# Altium PCB 5x5_ControllerBreakout.PcbDoc
Units mm, origin at the board's own origin, x right, y up, seen from the top; angles counter-clockwise.
Board outline 50 x 50 mm, 2 copper layers (Top Layer, Bottom Layer), stack 0.325 mm thick; 4 components, 32 nets, 178 pads, 23 vias.
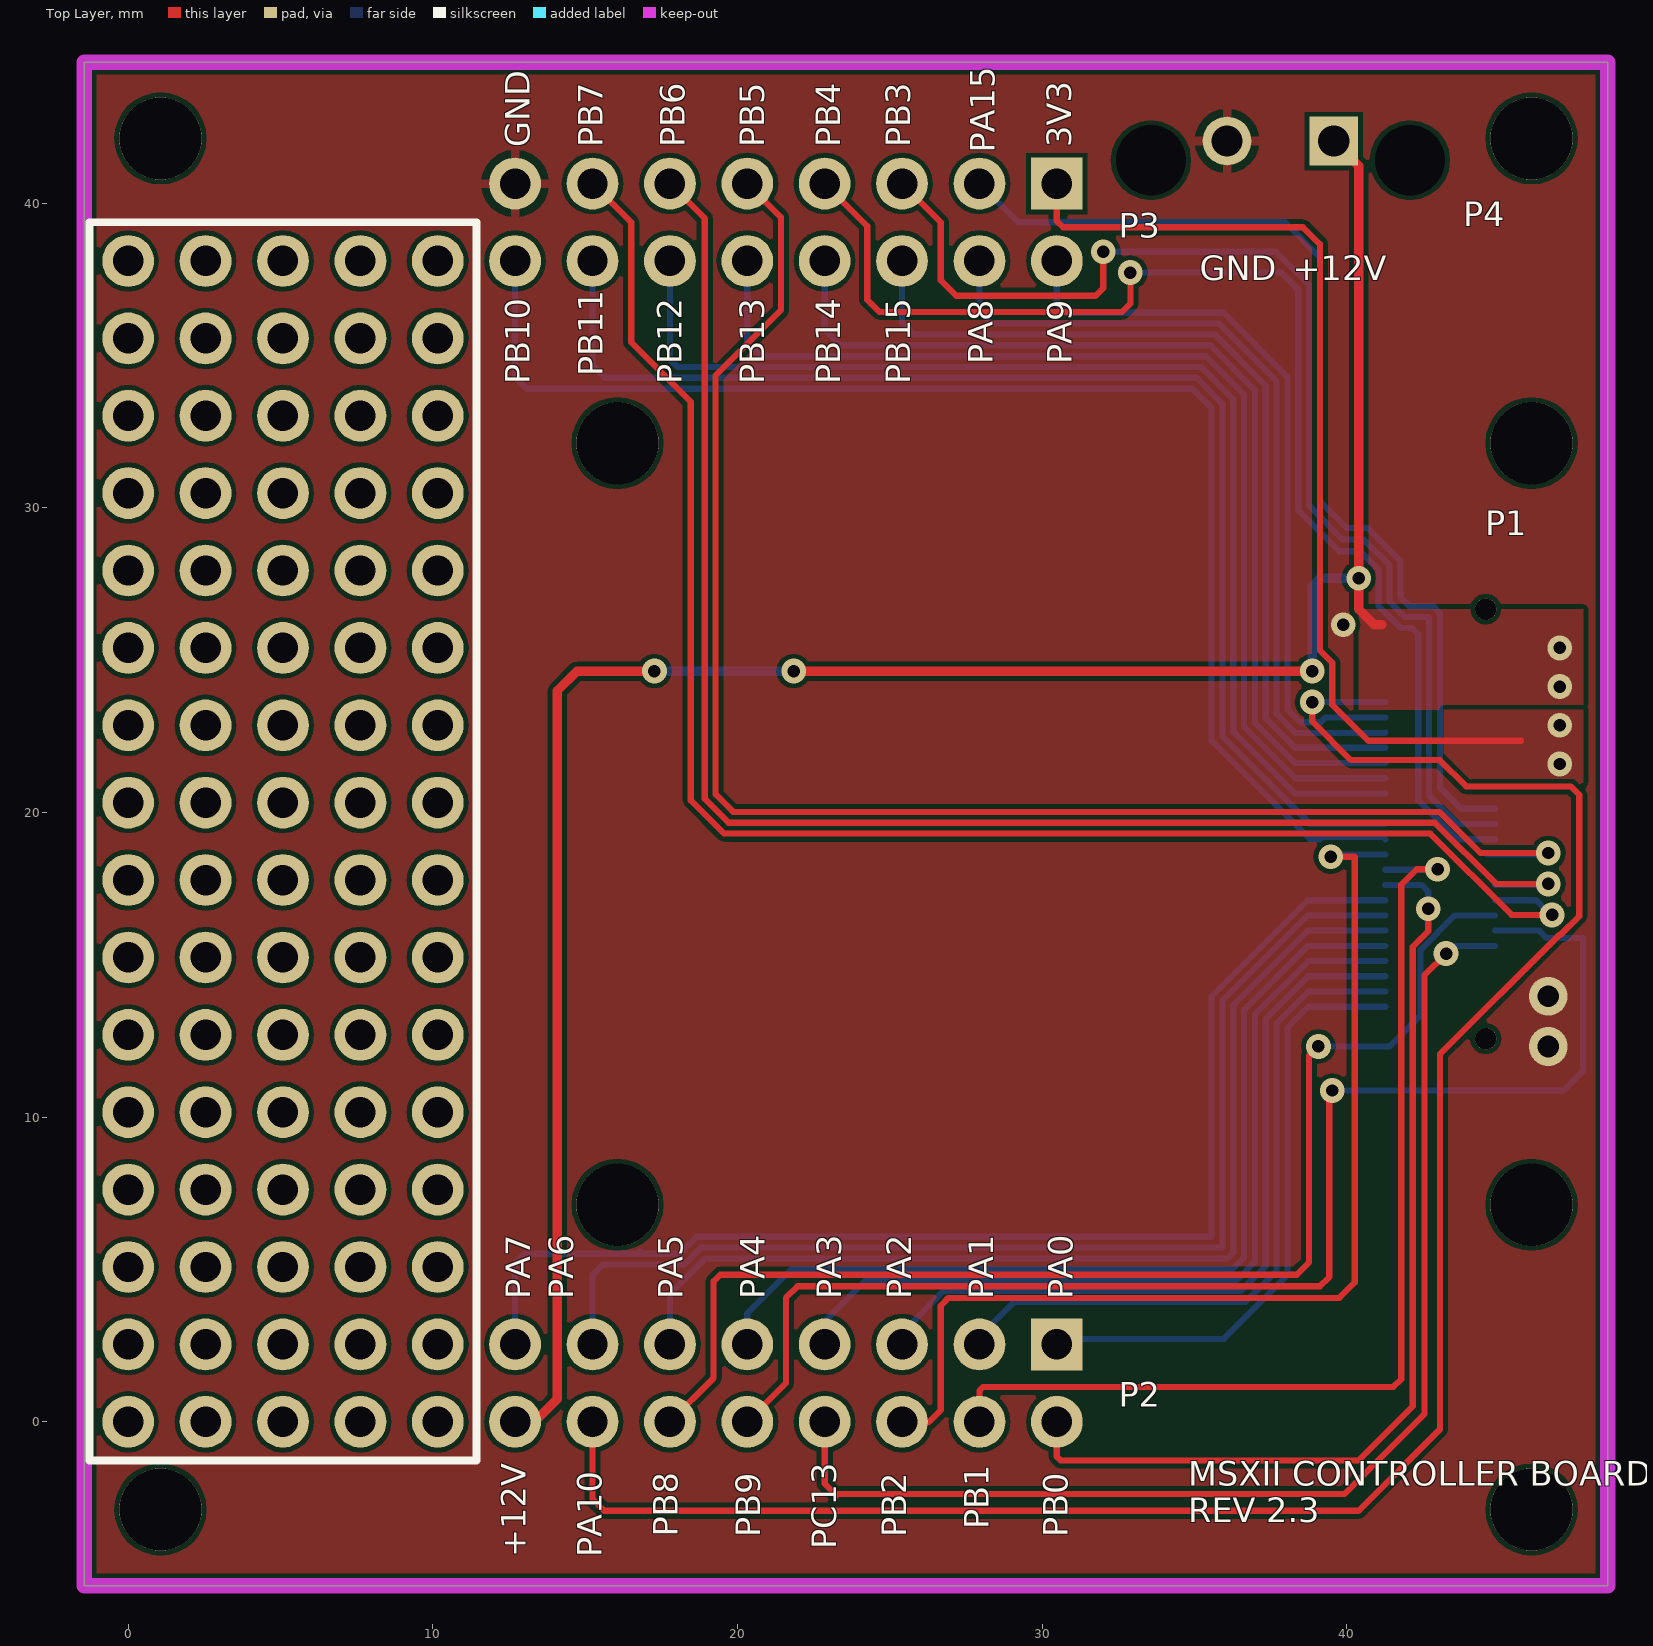
[diagram p0: Top Layer view]
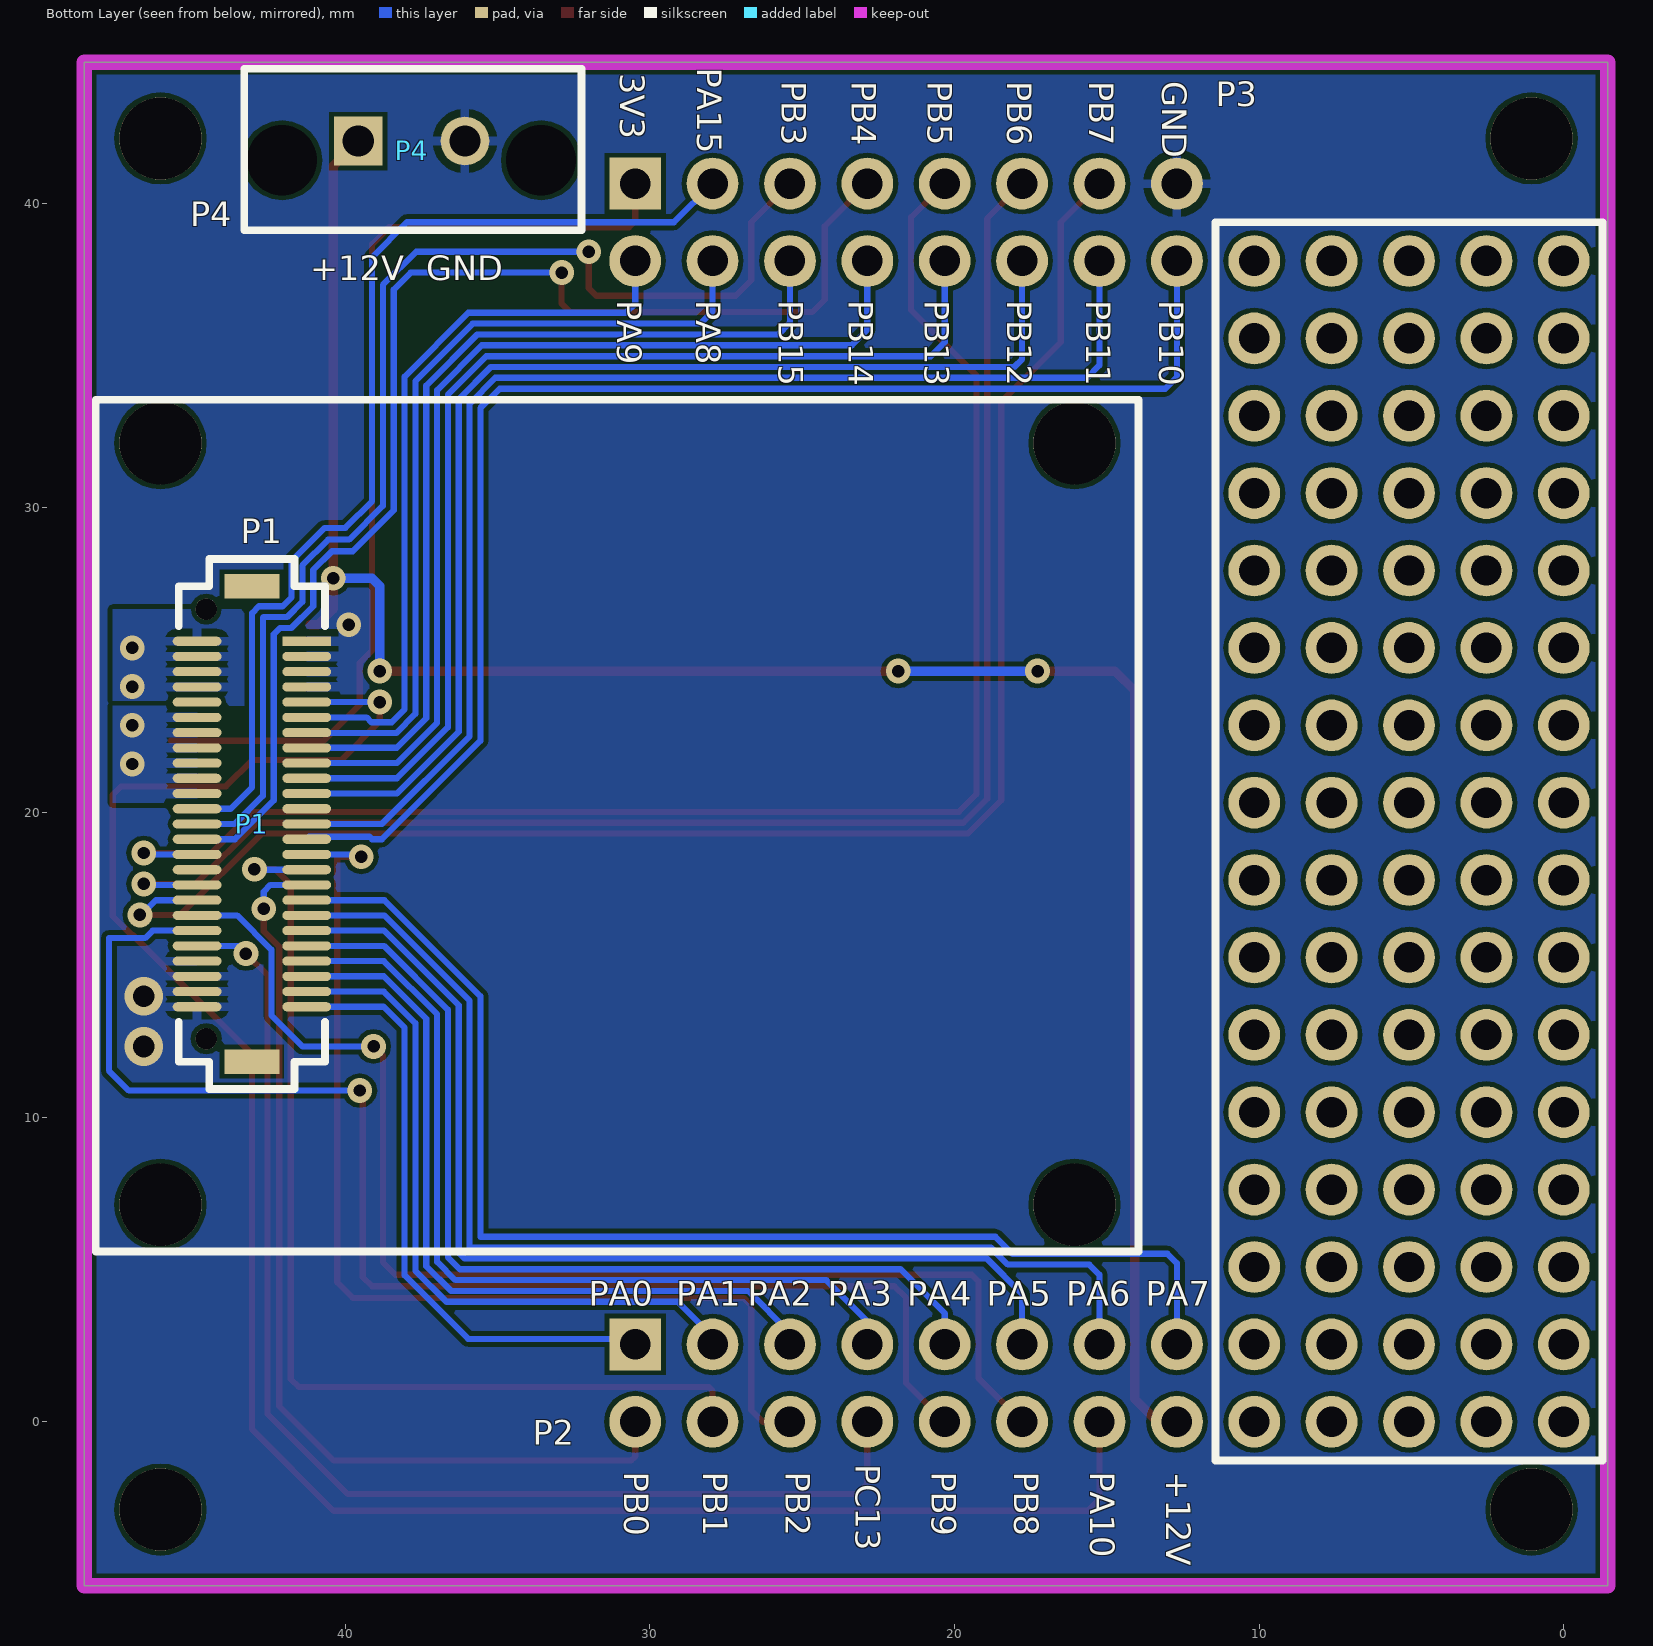
[diagram p1: Bottom Layer view, seen from below]

## Layer stack, top to bottom
Top Solder: solder mask 0.0102, Solder Resist, Dk 3.5
Top Layer: signal copper 0.0356
Dielectric 1: core 0.254, FR-4, Dk 4.2
Bottom Layer: signal copper 0.0356
Bottom Solder: solder mask 0.0102, Solder Resist, Dk 3.5

## Board outline
-1.44,-5.38 48.56,-5.38 48.56,44.62 -1.44,44.62

## Design rules (kind name [scope] priority, off if disabled: settings)
Clearance [All] p1: gap=0.152
HoleSize [All] p1: absolutevalues=TRUE maxlimit=5.08 minlimit=0.025 maxpercent=80.000 minpercent=20.000
PolygonConnect 3V3_Via_PolygonConnect [IsVia vs InNet('3V3')] p1: connectstyle=Direct reliefconductorwidth=0.3 reliefentries=4 polygonreliefangle="90 Angle" airgapwidth=0.254
PolygonConnect 12V_Via_PolygonConnect [IsVia vs InNet('+12V')] p2: connectstyle=Direct reliefconductorwidth=0.3 reliefentries=4 polygonreliefangle="90 Angle" airgapwidth=0.254
PolygonConnect GND_Via_PolygonConnect [IsVia vs InNet('GND')] p3: connectstyle=Direct reliefconductorwidth=0.3 reliefentries=4 polygonreliefangle="90 Angle" airgapwidth=0.254
PolygonConnect 3V3_Header_PolygonConnect [HasFootprint('CONN HEADER 8POS .100" SNGL SMD') vs InNet('3V3')] p4: connectstyle=Direct reliefconductorwidth=0.3 reliefentries=4 polygonreliefangle="90 Angle" airgapwidth=0.254
PolygonConnect [All] p5: connectstyle=Relief reliefconductorwidth=0.3 reliefentries=4 polygonreliefangle="90 Angle" airgapwidth=0.254
RoutingVias [All] p1: holewidth=0.3 width=0.605 viastyle="Through Hole" minholewidth=0.3 minwidth=0.605 maxholewidth=5.08 maxwidth=5.08
SolderMaskExpansion [All] p1: expansion=0.102
Width [All] p1: maxlimit=2.54 minlimit=0.152 preferedwidth=0.203 minimp=50.000000 maximp=50.000000 favimp=50.000000
29 further rules are at their usual default settings.

## Classes and differential pairs
component class MSXII_Controller_Breakout: P2 P3 P4
component class Controller_Board_Interface: P1

## Components (designator, comment, footprint, x,y, rotation, side; value= is the part's Value field where it differs from the comment)
P1 "CONN 50POS Bergstak Plug 0.02\"" "CONN, Bergstak 50 Pos Plug" 43.06,19.62 r180 bottom locked
P2 "16POS" "CONN, 16POS 0.100\" Header" 30.48,2.54 r180 top
P3 "16POS" "CONN, 16POS 0.100\" Header" 30.48,40.64 r180 top
P4 "CONN 2POS ULTRA-FIT 0.138\"" "CONN, 2POS ULTRA-FIT" 39.568,42.037 r180 bottom

## Footprints (in the part's own frame and the unit in brackets; to place one, negate y for a bottom-side part, rotate by r counter-clockwise, add the part's x,y. Pads: shape width x height; smd on the part's side, far side on the other; paste and mask are expansions set on the pad)
"CONN, 2POS ULTRA-FIT" [mm] "2 Positions Header, Shrouded Connector 0.138\" (3.50mm) Through Hole Gold"
  rect 1.6x1.6 hole 1.02: 1(0,0)
  round 1.6 hole 1.02: 2(3.5,0)
  round 1.6 hole 2.3: ""(-2.5,-0.63) ""(6,-0.63)
  silkscreen extent -3.74,-2.93 7.33,2.37, body extent -3.48,-2.87 7.12,5.79, height 13.85
"CONN, 16POS 0.100\" Header" [mm]
  rect 1.7x1.7 hole 1: 1(0,0)
  round 1.7 hole 1: 2(2.54,0) 3(5.08,0) 4(7.62,0) 5(10.16,0) 6(12.7,0) 7(15.24,0) 8(17.78,0) 9(17.78,2.54) 10(15.24,2.54) 11(12.7,2.54) 12(10.16,2.54) 13(7.62,2.54) 14(5.08,2.54) 15(2.54,2.54) 16(0,2.54)
"CONN, Bergstak 50 Pos Plug" [mm] "Bergstak 50 Position Plug"
  rect 1.6x0.3 smd: 1(1.8,6)
  oval 1.6x0.3 smd: 2(1.8,5.5) 3(1.8,5) 4(1.8,4.5) 5(1.8,4) 6(1.8,3.5) 7(1.8,3) 8(1.8,2.5) 9(1.8,2) 10(1.8,1.5) 11(1.8,1) 12(1.8,0.5) 13(1.8,0) 14(1.8,-0.5) 15(1.8,-1) 16(1.8,-1.5) 17(1.8,-2) 18(1.8,-2.5) 19(1.8,-3) 20(1.8,-3.5) 21(1.8,-4) 22(1.8,-4.5) 23(1.8,-5) 24(1.8,-5.5) 25(1.8,-6) 26(-1.8,-6) 27(-1.8,-5.5) 28(-1.8,-5) 29(-1.8,-4.5) 30(-1.8,-4) 31(-1.8,-3.5) 32(-1.8,-3) 33(-1.8,-2.5) 34(-1.8,-2) 35(-1.8,-1.5) 36(-1.8,-1) 37(-1.8,-0.5) 38(-1.8,0) 39(-1.8,0.5) 40(-1.8,1) 41(-1.8,1.5) 42(-1.8,2) 43(-1.8,2.5) 44(-1.8,3) 45(-1.8,3.5) 46(-1.8,4) 47(-1.8,4.5) 48(-1.8,5) 49(-1.8,5.5) 50(-1.8,6)
  round 0.7 hole 0.7: ""(-1.5,-7.05) ""(-1.5,7.05)
  rect 1.8x0.8 smd: ""(0,-7.8) ""(0,7.8)
  silkscreen extent -2.4,-8.7 2.4,8.7

## Part data
P1: "50 Position Connector Plug, Outer Shroud Contacts Surface Mount Gold"
P2 P3: library part "CONN 16POS HEADR MALE 0.1\"", "CONN HEADER .100\" DUAL STR 16POS"
P4: "2 Positions Header, Shrouded Connector 0.138\" (3.50mm) Through Hole Gold"

## Free pads (board coordinates)
  round 1.7 hole 1: 0(0,0) 0(0,2.54) 0(0,5.08) 0(0,7.62) 0(0,10.16) 0(0,12.7) 0(0,15.24) 0(0,17.78) 0(0,20.32) 0(0,22.86) 0(0,25.4) 0(0,27.94) 0(0,30.48) 0(0,33.02) 0(0,35.56) 0(0,38.1) 0(2.54,0) 0(2.54,2.54) 0(2.54,5.08) 0(2.54,7.62) 0(2.54,10.16) 0(2.54,12.7) 0(2.54,15.24) 0(2.54,17.78) 0(2.54,20.32) 0(2.54,22.86) 0(2.54,25.4) 0(2.54,27.94) 0(2.54,30.48) 0(2.54,33.02) 0(2.54,35.56) 0(2.54,38.1) 0(5.08,0) 0(5.08,2.54) 0(5.08,5.08) 0(5.08,7.62) 0(5.08,10.16) 0(5.08,12.7) 0(5.08,15.24) 0(5.08,17.78) 0(5.08,20.32) 0(5.08,22.86) 0(5.08,25.4) 0(5.08,27.94) 0(5.08,30.48) 0(5.08,33.02) 0(5.08,35.56) 0(5.08,38.1) 0(7.62,0) 0(7.62,2.54) 0(7.62,5.08) 0(7.62,7.62) 0(7.62,10.16) 0(7.62,12.7) 0(7.62,15.24) 0(7.62,17.78) 0(7.62,20.32) 0(7.62,22.86) 0(7.62,25.4) 0(7.62,27.94) 0(7.62,30.48) 0(7.62,33.02) 0(7.62,35.56) 0(7.62,38.1) 0(10.16,0) 0(10.16,2.54) 0(10.16,5.08) 0(10.16,7.62) 0(10.16,10.16) 0(10.16,12.7) 0(10.16,15.24) 0(10.16,17.78) 0(10.16,20.32) 0(10.16,22.86) 0(10.16,25.4) 0(10.16,27.94) 0(10.16,30.48) 0(10.16,33.02) 0(10.16,35.56) 0(10.16,38.1)
  round 2.7 hole 2.7: ""(1.06,-2.88) ""(1.06,42.12) ""(16.06,7.12) ""(16.06,32.12) ""(46.06,7.12) ""(46.06,32.12) ""(46.06,-2.88) ""(46.06,42.12)

## Via types
v1: diameter 0.813, hole 0.406, Top Layer to Bottom Layer, tented both sides, 21 vias
v2: diameter 1.27, hole 0.711, Top Layer to Bottom Layer, tented both sides, 2 vias

## Nets (pads, with @x,y where several pads share a name; then routed paths per layer and width w, separated by ;. In a path a pad name is that pad's centre, name@x,y a point inside that pad or via, vN(x,y) a via of type N, cw(c..) or ccw(c..) an arc to the next point about the centre after c; other vN are vias at no path point)
3V3: P1.40 P1.41 P1.42 P1.43 P1.44 P1.45 P3.1 | length 32.2
  Top Layer w0.203: P3.1 30.48,39.408 30.684,39.204 38.558,39.204 39.116,38.646 39.116,25.318 39.522,24.912 39.522,23.535 40.706,22.352 45.72,22.352
  other v1: 46.99,21.59 46.99,22.86
+12V: P1.47 P1.48 P1.49 P1.50 P2.9 P4.1 | length 71.1
  Top Layer w0.305: P2.9 13.335,0 14.085,0.75 14.085,23.991 14.732,24.638 v1(17.272,24.638) ; v1(21.844,24.638) v1(38.862,24.638) ; P4.1 40.386,41.219 v1(40.386,27.686) 40.386,26.67 40.894,26.162 41.148,26.162
  Bottom Layer w0.305: v1(17.272,24.638) v1(21.844,24.638) ; v1(38.862,24.638) 38.862,27.432 39.116,27.686 v1(40.386,27.686)
  other v1: 46.99,24.13 46.99,25.4
GND: P1.1 P1.2 P1.3 P1.4 P1.26 P1.27 P1.28 P1.29 P3.8 P4.2
  other v1: 39.878,26.162
  other v2: 46.609,12.319 46.609,13.97
PA0: P1.25 P2.1 | length 20.2
  Bottom Layer w0.203: P2.1@30.48,2.286 30.912,2.718 35.956,2.718 38.049,4.811 38.049,12.934 38.735,13.62 P1.25
PA1: P1.24 P2.2 | length 23
  Bottom Layer w0.203: P2.2 27.94,2.794 29.083,3.937 36.672,3.937 37.694,4.958 37.694,13.081 38.732,14.12 P1.24
PA2/USART2_TX: P1.23 P2.3 | length 25.8
  Bottom Layer w0.203: P2.3 25.4,2.921 26.772,4.293 36.525,4.293 37.338,5.106 37.338,13.228 38.73,14.62 P1.23
PA3/USART2_RX: P1.22 P2.4 | length 28.8
  Bottom Layer w0.203: P2.4 22.86,3.302 24.206,4.648 36.378,4.648 36.982,5.253 36.982,13.376 38.727,15.12 P1.22
PA4/SPI1_NSS: P1.21 P2.5 | length 31.7
  Bottom Layer w0.203: P2.5 20.32,3.556 21.768,5.004 36.23,5.004 36.627,5.4 36.627,13.523 38.724,15.62 P1.21
PA5/SPI1_SCK: P1.20 P2.6 | length 34.8
  Bottom Layer w0.203: P2.6 17.78,4.191 18.948,5.359 36.083,5.359 36.271,5.547 36.271,13.67 38.721,16.12 P1.20
PA6/SPI1_MISO: P1.19 P2.7 | length 37.9
  Bottom Layer w0.203: P2.7 15.24,4.826 15.574,5.16 18.247,5.16 18.801,5.715 35.916,5.715 35.916,13.818 38.718,16.62 P1.19
PA7/SPI1_MOSI: P1.18 P2.8 | length 40.9
  Bottom Layer w0.203: P2.8 12.7,5.207 13.009,5.516 16.724,5.516 ; 16.796,5.588 16.724,5.516 ; P1.18 38.71,17.12 35.56,13.97 35.56,6.071 18.654,6.071 18.099,5.516 16.724,5.516
PA8: P1.7 P3.15 | length 27.1
  Bottom Layer w0.203: P3.15 27.94,36.449 28.346,36.043 35.809,36.043 37.694,34.158 37.694,23.236 38.323,22.606 41.246,22.606 P1.7
PA9: P1.6 P3.16 | length 24.3
  Bottom Layer w0.203: P3.16 30.48,36.703 30.785,36.398 35.956,36.398 38.049,34.305 38.049,23.383 38.471,22.962 39.136,22.962 39.294,23.12 P1.6
PA10: P1.5 P2.10 | length 67.2
  Top Layer w0.203: P2.10 15.24,-2.54 15.621,-2.921 40.386,-2.921 43.053,-0.254 43.053,12.065 46.965,15.977 47.01,15.977 47.625,16.592 47.625,20.574 47.346,20.853 43.917,20.853 43.053,21.717 40.132,21.717 38.862,22.987 v1(38.862,23.622)
  Bottom Layer w0.203: v1(38.862,23.622) 40.009,23.622 40.007,23.62 P1.5
PA15: P1.39 P3.2 | length 34.2
  Bottom Layer w0.203: P3.2 29.21,39.37 37.973,39.37 39.116,38.227 39.116,30.213 39.992,29.337 40.675,29.337 41.758,28.254 41.758,27.063 42.055,26.766 42.827,26.766 43.053,26.54 43.053,20.828 43.761,20.12 P1.39
PB0: P1.17 P2.16 | length 32.2
  Top Layer w0.203: P2.16 30.48,-1.143 30.607,-1.27 40.386,-1.27 42.164,0.508 42.164,15.59 42.672,16.098 v1(42.672,16.84)
  Bottom Layer w0.203: P1.17 42.451,17.62 42.672,17.399 v1(42.672,16.84)
PB1: P1.16 P2.15 | length 34.4
  Top Layer w0.203: P2.15 27.94,1.016 28.067,1.143 41.529,1.143 41.783,1.397 41.783,17.628 42.291,18.136 v1(42.977,18.136)
  Bottom Layer w0.203: P1.16 42.961,18.12 v1(42.977,18.136)
PB2: P1.15 P2.14 | length 35.3
  Top Layer w0.203: P2.14 26.289,0 26.67,0.381 26.67,3.81 26.924,4.064 39.751,4.064 40.259,4.572 40.259,18.542 v1(39.472,18.542)
  Bottom Layer w0.203: v1(39.472,18.542) 39.55,18.62 P1.15
PB3: P1.38 P3.3 | length 39.5
  Top Layer w0.203: P3.3 26.67,39.37 26.67,37.465 27.178,36.957 31.75,36.957 32.004,37.211 v1(32.004,38.405)
  Bottom Layer w0.203: v1(32.004,38.405) 37.668,38.405 38.76,37.313 38.76,30.066 39.87,28.956 40.553,28.956 41.402,28.107 41.402,26.916 41.908,26.41 42.68,26.41 42.697,26.393 42.697,20.549 43.626,19.62 P1.38
PB4: P1.37 P3.4 | length 42.1
  Top Layer w0.203: P3.4 24.257,39.243 24.257,36.83 24.663,36.424 32.614,36.424 32.893,36.703 v1(32.893,37.719)
  Bottom Layer w0.203: v1(32.893,37.719) 37.846,37.719 38.405,37.16 38.405,29.918 39.748,28.575 40.431,28.575 41.046,27.96 41.046,26.769 41.76,26.055 42.134,26.055 42.342,25.847 42.342,20.396 43.618,19.12 P1.37
PB5: P1.36 P3.5 | length 51.4
  Top Layer w0.203: P3.5 21.424,39.536 21.424,36.488 19.279,34.343 19.279,20.589 19.853,20.015 43.037,20.015 44.383,18.669 v1(46.609,18.669)
  Bottom Layer w0.203: P1.36@44.606,18.62 P1.36 v1@46.531,18.62
PB6/USART1_TX: P1.34 P3.6 | length 51.7
  Top Layer w0.203: P3.6 18.923,39.497 18.923,20.442 19.705,19.66 42.89,19.66 44.896,17.653 v1(46.609,17.653) v1@46.679,17.653 ; v1@46.625,17.666 v1@46.625,17.949
  Bottom Layer w0.203: P1.34 46.646,17.62 46.613,17.653 v1(46.609,17.653)
PB7/USART1_RX: P1.33 P3.7 | length 53.7
  Top Layer w0.203: P3.7 16.51,39.37 16.51,35.433 18.466,33.477 18.466,20.396 19.558,19.304 42.742,19.304 45.409,16.637 v1@46.691,16.637 ; v1(46.736,16.637) v1@46.691,16.637 ; v1@46.863,16.809 v1@46.691,16.637
  Bottom Layer w0.203: P1.33 46.208,17.12 46.691,16.637 v1(46.736,16.637)
PB8/I2C1_SCL: P1.32 P2.11 | length 41.1
  Top Layer w0.203: P2.11 19.216,1.436 19.216,4.611 19.431,4.826 38.354,4.826 38.76,5.232 38.76,12.014 v1(39.065,12.319)
  Bottom Layer w0.203: v1(39.065,12.319) 41.402,12.319 42.418,13.335 42.418,15.494 43.544,16.62 P1.32
PB9/I2C1_SDA: P1.31 P2.12 | length 44.7
  Top Layer w0.203: P2.12 21.59,1.27 21.59,4.064 21.971,4.445 39.116,4.445 39.421,4.75 39.421,10.77 v1(39.522,10.871)
  Bottom Layer w0.203: v1(39.522,10.871) 47.097,10.871 47.752,11.527 47.752,15.875 46.564,15.875 46.319,16.12 P1.31
PB10/USART3_TX/I2C2_SCL: P1.14 P3.9 | length 45.1
  Bottom Layer w0.203: P3.9 12.7,34.29 13.081,33.909 34.925,33.909 35.56,33.274 35.56,22.352 38.792,19.12 39.116,19.12 39.198,19.202 41.178,19.202 P1.14
PB11/USART3_RX/I2C2_SDA: P1.13 P3.10 | length 42.1
  Bottom Layer w0.203: P3.10 15.24,34.671 15.646,34.265 35.072,34.265 35.916,33.421 35.916,22.499 38.795,19.62 P1.13
PB12/SPI2_NSS: P1.11 P3.11 | length 39
  Bottom Layer w0.203: P3.11 17.78,34.874 18.034,34.62 35.22,34.62 36.271,33.569 36.271,22.647 38.298,20.62 P1.11
PB13/SPI2_SCK: P1.10 P3.12 | length 35.9
  Bottom Layer w0.203: P3.12 20.32,35.433 20.777,34.976 35.367,34.976 36.627,33.716 36.627,22.794 38.301,21.12 P1.10
PB14/SPI2_MISO: P1.9 P3.13 | length 32.9
  Bottom Layer w0.203: P3.13 22.86,35.839 23.368,35.331 35.514,35.331 36.982,33.863 36.982,22.941 38.304,21.62 P1.9
PB15/SPI2_MOSI: P1.8 P3.14 | length 30.1
  Bottom Layer w0.203: P3.14 25.4,36.068 25.781,35.687 35.661,35.687 37.338,34.01 37.338,23.088 38.306,22.12 P1.8
PC13: P1.30 P2.13 | length 40.1
  Top Layer w0.203: P2.13 22.86,-2.032 23.202,-2.374 ; 23.241,-2.413 23.202,-2.374 ; v1(43.256,15.367) 42.545,14.656 42.545,0.254 39.917,-2.374 23.202,-2.374
  Bottom Layer w0.203: v1(43.256,15.367) 43.509,15.62 P1.30
pads on no net: P1. P1.12 P1.35 P1.46 P4.

## Polygon pours and split planes (outlines as drawn)
GND on Top Layer "GND_L01_P072" (solid, remove dead copper, pour order 72): -1.313,-5.253 48.433,-5.253 48.433,44.493 -1.313,44.493
3V3 on Top Layer "3V3_L01_P070" (solid, pour order 70): 43.18,23.368 47.752,23.368 47.752,20.066 47.498,20.32 43.18,20.32
+12V on Top Layer "+12V_L01_P071" (solid, pour order 71): 40.386,26.67 47.752,26.67 47.752,23.368 40.386,23.368
GND on Bottom Layer "GND_L02_P075" (solid, remove dead copper, pour order 75): -1.154,44.339 -1.157,44.336 -1.157,-5.094 48.279,-5.094 48.279,44.308
+12V on Bottom Layer "+12V_L02_P074" (solid, pour order 74): 43.18,26.67 43.18,23.495 47.625,23.495 47.625,26.67
3V3 on Bottom Layer "3V3_L02_P073" (solid, pour order 73): 43.312,23.495 47.625,23.495 47.625,20.32 43.561,20.32 43.18,20.701

## Keep-outs
Keep-Out Layer:
  the board outline again, w0.5

## Silkscreen, mask and mechanical layers (free items; w line width, h text height)
Top Overlay:
  lines w0.254: -1.27,-1.27 3.81,-1.27 11.43,-1.27 11.43,6.35 11.43,39.37 -1.27,39.37 -1.27,-1.27
  text "GND" at 13.172,41.837 h0.8 r90
  text "PB7" at 15.572,41.837 h0.8 r90
  text "PB6" at 18.272,41.837 h0.8 r90
  text "PB5" at 20.872,41.837 h0.8 r90
  text "PB4" at 23.372,41.837 h0.8 r90
  text "PB3" at 25.672,41.837 h0.8 r90
  text "3V3" at 30.952,41.837 h0.8 r90
  text "PA15" at 28.448,41.656 h0.8 r90
  text "GND" at 35.179,37.465 h0.8
  text "+12V" at 38.227,37.465 h0.8
  text "PA8" at 28.372,34.718 h0.8 r90
  text "PA9" at 30.972,34.718 h0.8 r90
  text "PB11" at 15.572,34.318 h0.8 r90
  text "PB10" at 13.172,34.052 h0.8 r90
  text "PB12" at 18.172,34.052 h0.8 r90
  text "PB13" at 20.872,34.052 h0.8 r90
  text "PB14" at 23.372,34.052 h0.8 r90
  text "PB15" at 25.672,34.052 h0.8 r90
  text "PA7" at 13.199,4.017 h0.8 r90
  text "PA6" at 14.605,4.017 h0.8 r90
  text "PA5" at 18.199,4.017 h0.8 r90
  text "PA4" at 20.899,4.017 h0.8 r90
  text "PA3" at 23.399,4.017 h0.8 r90
  text "PA2" at 25.699,4.017 h0.8 r90
  text "PA1" at 28.399,4.017 h0.8 r90
  text "PA0" at 30.999,4.017 h0.8 r90
  text "MSXII CONTROLLER BOARD BREAKOUT / REV 2.3" at 34.798,-3.302 h0.8
  text "PB1" at 28.245,-3.531 h0.8 r90
  text "PB8" at 18.045,-3.776 h0.8 r90
  text "PB9" at 20.745,-3.797 h0.8 r90
  text "PB2" at 25.545,-3.797 h0.8 r90
  text "PB0" at 30.845,-3.797 h0.8 r90
  text "PC13" at 23.241,-4.191 h0.8 r90
  text "+12V" at 13.045,-4.443 h0.8 r90
  text "PA10" at 15.545,-4.443 h0.8 r90
Bottom Overlay:
  lines w0.254: -1.27,-1.27 -1.27,39.37 11.43,39.37 11.43,6.35 11.43,-1.27 3.81,-1.27 -1.27,-1.27 ; 13.96,5.588 48.189,5.588 48.189,33.541 13.96,33.541 13.96,5.588
  text "PA15" at 28.448,44.45 h0.8 r90
  text "3V3" at 30.972,44.257 h0.8 r90
  text "GND" at 13.172,43.991 h0.8 r90
  text "PB7" at 15.572,43.991 h0.8 r90
  text "PB6" at 18.272,43.991 h0.8 r90
  text "PB5" at 20.872,43.991 h0.8 r90
  text "PB4" at 23.372,43.991 h0.8 r90
  text "PB3" at 25.672,43.991 h0.8 r90
  text "P3" at 11.43,43.18 h0.8
  text "P4" at 45.085,39.243 h0.8
  text "GND" at 37.338,37.465 h0.8
  text "+12V" at 41.148,37.465 h0.8
  text "PB10" at 13.272,36.805 h0.8 r90
  text "PB11" at 15.672,36.805 h0.8 r90
  text "PB12" at 18.272,36.805 h0.8 r90
  text "PB13" at 20.972,36.805 h0.8 r90
  text "PB14" at 23.472,36.805 h0.8 r90
  text "PB15" at 25.772,36.805 h0.8 r90
  text "PA8" at 28.472,36.805 h0.8 r90
  text "PA9" at 31.072,36.805 h0.8 r90
  text "P1" at 43.434,28.829 h0.8
  text "PA7" at 13.716,3.81 h0.8
  text "PA6" at 16.329,3.81 h0.8
  text "PA5" at 18.941,3.81 h0.8
  text "PA4" at 21.554,3.81 h0.8
  text "PA3" at 24.166,3.81 h0.8
  text "PA2" at 26.779,3.81 h0.8
  text "PA1" at 29.125,3.81 h0.8
  text "PA0" at 32.004,3.81 h0.8
  text "P2" at 33.845,-0.762 h0.8
  text "PC13" at 23.241,-1.397 h0.8 r90
  text "+12V" at 13.045,-1.644 h0.8 r90
  text "PA10" at 15.545,-1.644 h0.8 r90
  text "PB8" at 18.045,-1.644 h0.8 r90
  text "PB9" at 20.745,-1.644 h0.8 r90
  text "PB2" at 25.545,-1.644 h0.8 r90
  text "PB1" at 28.245,-1.644 h0.8 r90
  text "PB0" at 30.845,-1.644 h0.8 r90